# EAGLE board sparkfun_redstick (EAGLE 7.5.0)
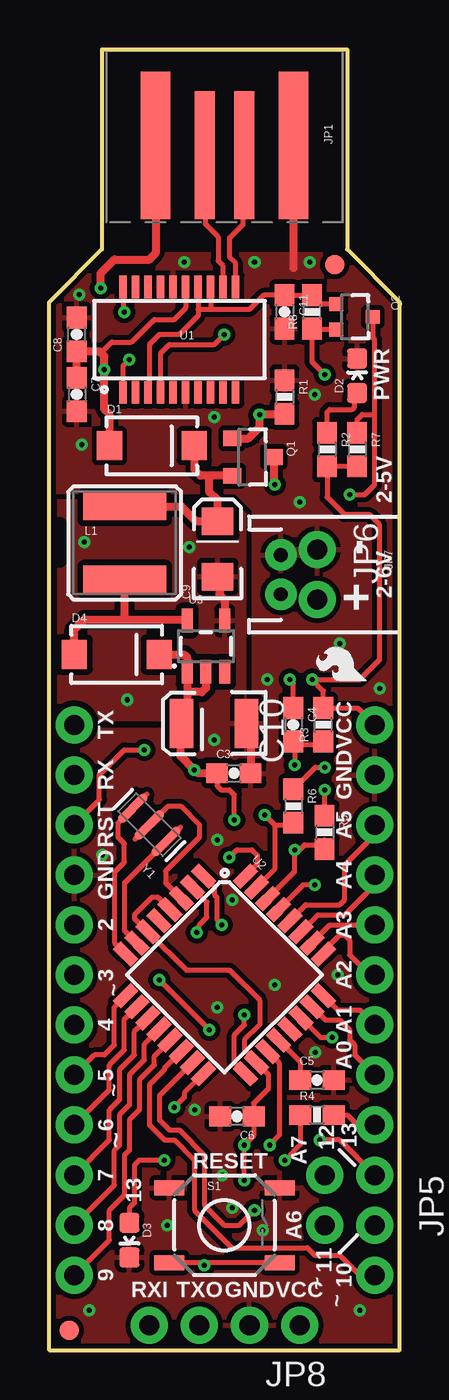
[diagram p0: board, top side]
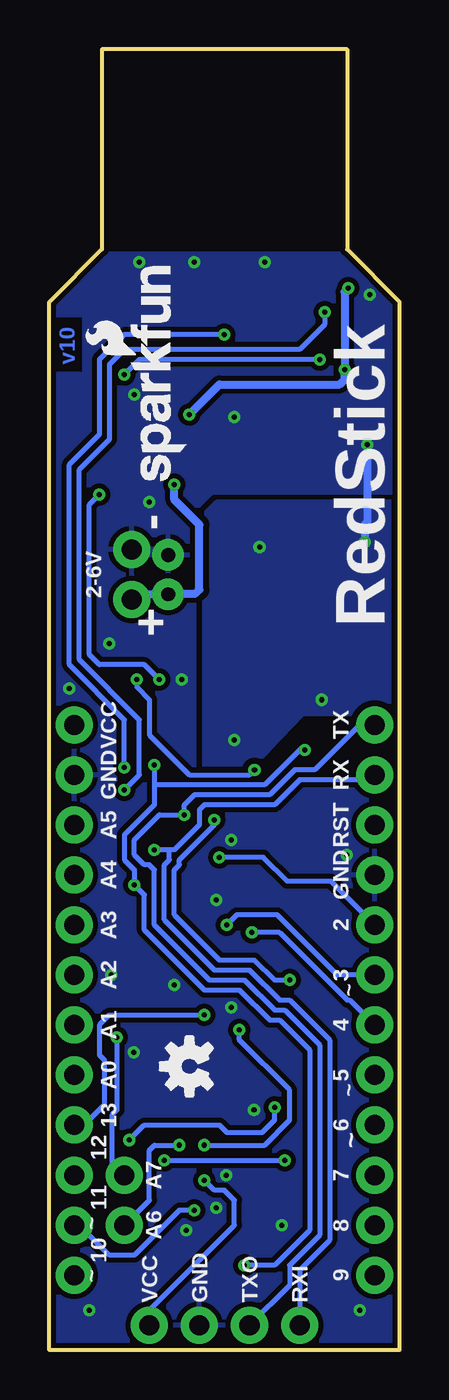
[diagram p1: board, bottom side, seen from below]

Size 17.78 x 66.04 mm. Coordinates in mm from the lower left corner, seen from the top.
Outline: 0,0 17.78,0 17.78,53.21 15.11,55.88 15.11,66.04 2.67,66.04 2.67,55.88 0,53.21 0,0
Copper layers (1*16): Top 0.035mm / dielectric 1.5mm / Bottom 0.035mm
Design rules "SparkFun-2-layer-TIGHT": minimum track width 7mil, minimum drill 15mil, track to track 7mil, track to pad 7mil, pad to pad 7mil, via to via 7mil, smd to smd 7mil, copper to edge 7mil, drill to drill 7mil, minimum pad ring 7mil, minimum via ring 7mil, stop-mask expansion 4mil, vias tented up to drill 20mil, thermal gap 10mil
tRestrict: 6 lines

## Footprints (pad centres in the part's own frame; a part is rotated, then mirrored left to right if it is on the bottom)
0603-CAP = smd 1.1 x 1: 1 -0.85,0; 2 0.85,0
EIA3216 = smd 1.4 x 1.6: A 1.4,0; C -1.4,0
EIA3528 = smd 1.2 x 2.5: A 1.65,0; C -1.65,0
SMA-DIODE = smd 1.27 x 1.47: A -2.15,0; C 2.15,0
LED-0603 = smd 1 x 1: A 0,-0.877; C 0,0.877
FIDUCIAL-1X2 = smd 1 x 1: 1 0,0
USB-A-PCB-NOPASTE = smd 7.5 x 1.5: 5V -0.2,-3.5; GND -0.2,3.5 | smd 6.5 x 1: USB_M 0.3,-1; USB_P 0.3,1
1X12_NO_SILK = drill 1.016 pad 1.88: 1 0,0; 2 2.54,0; 3 5.08,0; 4 7.62,0; 5 10.16,0; 6 12.7,0; 7 15.24,0; 8 17.78,0; 9 20.32,0; 10 22.86,0; 11 25.4,0; 12 27.94,0
1X02_NO_SILK = drill 1.016 pad 1.88: 1 0,0; 2 2.54,0
JST-2-PTH = drill 0.7 pad 1.6: 1 -1,0; 2 1,0
1X04_NO_SILK_ALL_ROUND = drill 1.016 pad 1.88: 1 0,0; 2 2.54,0; 3 5.08,0; 4 7.62,0
CR54 = smd 4.2 x 1.4: P$1 0,1.85; P$2 0,-1.85
SOT23-3 = smd 0.8 x 0.9: 1 -0.95,-1; 2 0.95,-1; 3 0,1.1
SOT323 = smd 0.7 x 0.7: 1 -0.65,-0.925; 2 0.65,-0.925; 3 0,0.925
0603-RES = smd 1.1 x 1: 1 -0.85,0; 2 0.85,0
TACTILE-SWITCH-SMD = smd 1.524 x 0.762: 1 -2.794,1.905; 2 2.794,1.905; 3 -2.794,-1.905; 4 2.794,-1.905
SSOP20_L = smd 0.381 x 1.143: 1 -2.857,-2.68; 2 -2.223,-2.68; 3 -1.587,-2.68; 4 -0.953,-2.68; 5 -0.318,-2.68; 6 0.318,-2.68; 7 0.953,-2.68; 8 1.587,-2.68; 9 2.223,-2.68; 10 2.857,-2.68; 11 2.857,2.68; 12 2.223,2.68; 13 1.587,2.68; 14 0.953,2.68; 15 0.318,2.68; 16 -0.318,2.68; 17 -0.953,2.68; 18 -1.587,2.68; 19 -2.223,2.68; 20 -2.857,2.68
TQFP32-08 = smd 1.27 x 0.559: 1 -4.293,2.8; 2 -4.293,2; 3 -4.293,1.2; 4 -4.293,0.4; 5 -4.293,-0.4; 6 -4.293,-1.2; 7 -4.293,-2; 8 -4.293,-2.8; 17 4.293,-2.8; 18 4.293,-2; 19 4.293,-1.2; 20 4.293,-0.4; 21 4.293,0.4; 22 4.293,1.2; 23 4.293,2; 24 4.293,2.8 | smd 0.559 x 1.27: 9 -2.8,-4.293; 10 -2,-4.293; 11 -1.2,-4.293; 12 -0.4,-4.293; 13 0.4,-4.293; 14 1.2,-4.293; 15 2,-4.293; 16 2.8,-4.293; 25 2.8,4.293; 26 2,4.293; 27 1.2,4.293; 28 0.4,4.293; 29 -0.4,4.293; 30 -1.2,4.293; 31 -2,4.293; 32 -2.8,4.293
SOT23-5 = smd 0.55 x 1.2: 1 -0.95,-1.3; 2 0,-1.3; 3 0.95,-1.3; 4 0.95,1.3; 5 -0.95,1.3
RESONATOR-SMD = smd 0.45 x 1.905: 1 -1.2,0; 2 0,0; 3 1.2,0

## Placement (x,y rotation side)
C3  0.1uF  [0603-CAP]  9.37,29.29 0 top
C4  0.1uF  [0603-CAP]  12.38,31.75 270 top
C5  0.1uF  [0603-CAP]  13.59,13.72 0 top
C6  0.1uF  [0603-CAP]  9.53,11.87 180 top
C7  0.1uF  [0603-CAP]  1.4,48.51 270 top
C8  0.1uF  [0603-CAP]  1.4,51.56 90 top
C9  10uF  [EIA3216]  8.54,40.67 90 top
C10  68uF  [EIA3528]  8.36,31.81 180 top
C11  0.1uF  [0603-CAP]  11.94,52.7 270 top
D1  MBRA140  [SMA-DIODE]  5.21,45.91 0 top
D2  RED  [LED-0603]  15.62,49.47 0 top
D3  GREEN  [LED-0603]  4.06,5.59 180 top
D4  MBRA140  [SMA-DIODE]  3.42,35.32 0 top
FID1  FIDUCIAL1X2  [FIDUCIAL-1X2]  1.02,1.02 0 top
FID2  FIDUCIAL1X2  [FIDUCIAL-1X2]  14.48,55.12 0 top
FRAME2  FRAME-LEDGER  [CREATIVE_COMMONS]  -20.09,-29.31 0 top  (outside the outline)
JP1  USBPCB_NOPASTE  [USB-A-PCB-NOPASTE]  8.89,60.96 270 top
JP2  DNP  [1X12_NO_SILK]  1.27,3.81 90 top
JP3  DNP  [1X12_NO_SILK]  16.51,31.75 270 top
JP5  M021X02_NO_SILK  [1X02_NO_SILK]  13.97,6.35 90 top
JP6  M021X02_NO_SILK  [1X02_NO_SILK]  13.59,40.64 270 top
JP7  DNP  [JST-2-PTH]  11.75,39.37 270 top
JP8  DNP  [1X04_NO_SILK_ALL_ROUND]  12.7,1.27 180 top
L1  47uH  [CR54]  3.83,40.98 0 top
LOGO1  SFE_LOGO_FLAME.1_INCH  [SFE_LOGO_FLAME_.1]  16.45,33.68 90 top
LOGO2  OSHW-LOGOS  [OSHW-LOGO-S]  10.67,14.41 90 bottom
Q1  DMG2307L  [SOT23-3]  10.29,45.34 270 top
Q2  MOSFET-NCHANNEL2N7002PW  [SOT323]  15.49,52.45 270 top
R1  100k  [0603-RES]  11.94,48.39 270 top
R2  6.8K  [0603-RES]  14.1,45.72 270 top
R3  10K  [0603-RES]  13.91,31.75 90 top
R4  2.2k  [0603-RES]  13.59,11.94 0 top
R5  1K  [0603-RES]  13.97,26.29 270 top
R6  1K  [0603-RES]  12.38,27.62 270 top
R7  10K  [0603-RES]  15.62,45.72 270 top
R8  10K  [0603-RES]  13.34,52.7 90 top
S1  SWITCH-MOMENTARY-2SMD-REDUNDANT  [TACTILE-SWITCH-SMD]  8.89,6.35 0 top
U1  FTS31XS-U  [SSOP20_L]  6.6,51.31 0 top
U2  ATMEGA328P_TQFP  [TQFP32-08]  8.89,19.05 315 top
U3  5.0v  [SOT23-5]  7.95,35.74 0 top
U$1  SFE_LOGO_NAME_FLAME.1_INCH  [SFE_LOGO_NAME_FLAME_.1]  10.73,43.69 90 bottom
Y1  16MHZ  [RESONATOR-SMD]  5.08,26.67 135 top

## Library data of the parts
C3-C8 C11 = SparkFun-Capacitors; PROD_ID: CAP-00810
C9 = SparkFun-Capacitors; PROD_ID: CAP-00811
C10 = SparkFun-Capacitors; PROD_ID: CAP-10790
D1 D4 = SparkFun-DiscreteSemi; PROD_ID: DIO-08053
D2 = SparkFun-LED; PROD_ID: DIO-00819
D3 = SparkFun-LED; PROD_ID: DIO-00821
FID1 FID2 FRAME2 LOGO1 LOGO2 U$1 = SparkFun-Aesthetics
JP1-JP3 JP5 JP6 JP8 = SparkFun-Connectors
JP7 = SparkFun-Connectors; PROD_ID: CONN-09863; SKU: PRT-09914
L1 = SparkFun-Passives; PROD_ID: NDUC-10789
Q1 = SparkFun-DiscreteSemi; PROD_ID: TRANS-11308
Q2 = SparkFun-DiscreteSemi; PROD_ID: TRANS-11151
R1 = SparkFun-Resistors; PROD_ID: RES-07828
R2 = SparkFun-Resistors; PROD_ID: RES-08597
R3 R7 R8 = SparkFun-Resistors; PROD_ID: RES-00824
R4 = SparkFun-Resistors; PROD_ID: RES-08272
R5 R6 = SparkFun-Resistors; PROD_ID: RES-07856
S1 = SparkFun-Electromechanical; FUNC: Reset; PROD_ID: SWCH-08247
U1 = SparkFun-DigitalIC; PROD_ID: IC-11524
U2 = SparkFun-DigitalIC; PROD_ID: IC-09069
U3 = SparkFun-PowerIC; PROD_ID: IC-10787
Y1 = SparkFun-FreqCtrl; PROD_ID: XTAL-08900

## Nets
3.3V: C11.1 Q2.1 R8.2 U1.3 U1.13 U1.14
A0: JP3.8 U2.23
A1: JP3.7 U2.24
A2: JP3.6 U2.25
A3: JP3.5 U2.26
A4: JP3.4 U2.27
A5: JP3.3 U2.28
A6: JP5.1 U2.19
A7: JP5.2 U2.22
AREF: C5.1 U2.20
D2: JP2.8 U2.32
D3: JP2.7 U2.1
D4: JP2.6 U2.2
D5: JP2.5 U2.9
D6: JP2.4 U2.10
D7: JP2.3 U2.11
D8: JP2.2 U2.12
D9: JP2.1 U2.13
D10: JP3.12 U2.14
D+: JP1.USB_P U1.11
D-: JP1.USB_M U1.12
DTR: C4.1 Q2.3 R7.1
GND: C3.2 C5.2 C6.2 C7.2 C8.2 C9.C C10.C C11.2 D2.C D3.C JP1.GND JP2.9 JP3.2 JP6.1 JP7.1 JP8.2 R1.1 S1.1 S1.2 U1.6 U1.16 U2.3 U2.5 U2.21 U3.4 Y1.2
MISO: JP3.10 U2.16
MOSI: JP3.11 U2.15
N$1: D3.A R4.1
N$3: R5.1 U1.20
N$4: D2.A R2.1
N$5: U2.7 Y1.1
N$6: U2.8 Y1.3
N$7: R6.1 U1.4
N$8: D4.A L1.P$2 U3.5
N$11: Q2.2 R8.1 U1.1
RESET: C4.2 JP2.10 R3.1 S1.3 S1.4 U2.29
RXI: JP2.11 JP8.4 R5.2 U2.30
SCK: JP3.9 R4.2 U2.17
TXO: JP2.12 JP8.3 R6.2 U2.31
V_USB: C7.1 C8.1 D1.A JP1.5V Q1.1 R1.2 U1.15
VBAT: JP6.2 JP7.2 Q1.3
VCC: C3.1 C6.1 C10.A D4.C JP3.1 JP8.1 R2.2 R3.2 R7.2 U2.4 U2.6 U2.18 U3.1 U3.2
VCC_1: C9.A D1.C L1.P$1 Q1.2

## Tracks (layer width: path | path; a pad name or v marks a point on that pad's centre or on a via)
3.3V
  Top 0.254: 8.19,52.83 10.16,52.83 10.88,53.55 C11.1 R8.2 13.37,53.59 13.34,53.59 13.83,53.1 Q2.1 | 8.13,53.92 U1.13 8.19,52.83 | 7.62,53.92 U1.14 7.56,52.83 | 7.56,52.83 7.56,52.51 6.6,51.56 5.59,51.56 5.08,51.05 5.08,48.69 U1.3 | 8.19,52.83 7.56,52.83
A0
  Top 0.254: U2.23 14,16.76 14.73,16.76 15.24,16.26 15.24,15.75 15.49,15.49 15.49,14.99 JP3.8
A1
  Top 0.254: U2.24 14.63,17.27 15.75,17.27 JP3.7
A2
  Top 0.254: JP3.6 16.26,19.05 15.24,20.07 15.24,20.83 14.99,21.08 14.73,21.08 13.9,20.25 U2.25
A3
  Top 0.254: JP3.5 14.22,21.59 13.34,20.71 U2.26
A4
  Top 0.254: JP3.4 16.26,24.13 16.26,23.37 14.99,22.1 13.63,22.1 U2.27
A5
  Top 0.254: JP3.3 16.51,26.16 14.99,24.64 14.99,22.86 14.73,22.61 13.01,22.61 U2.28
A6  (via drill 0.25)
  Top 0.254: v11.18,10.41 11.68,10.92 11.68,14.56 U2.19
  Bottom 0.254: v11.18,10.41 12.45,10.41 12.7,10.16 12.7,7.62 JP5.1
A7  (via drill 0.25)
  Top 0.254: U2.22 13.76,15.88 v14.35,15.88
  Bottom 0.254: v14.35,15.88 14.35,12.19 14.61,11.94 14.61,9.53 JP5.2
AREF
  Top 0.254: U2.20 12.74,14.63 C5.1
D2  (via drill 0.25)
  Top 0.254: v9.14,25.02 9.53,25.4 10.29,25.4 10.54,25.15 10.54,24.66 U2.32
  Bottom 0.254: v9.14,25.02 6.92,25.02 5.71,23.81 3.49,23.81 JP2.8
D3  (via drill 0.25)
  Top 0.254: v8.76,21.59 8.51,21.84 8.51,22.99 8.38,23.11 8.38,23.52 U2.1
  Bottom 0.254: v8.76,21.59 8.26,22.1 6.22,22.1 3.17,19.05 JP2.7
D4  (via drill 0.25)
  Top 0.254: v7.49,21.21 7.62,21.34 7.62,21.59 8,21.97 8,22.77 U2.2
  Bottom 0.254: JP2.6 2.54,17.78 2.67,17.78 6.1,21.21 v7.49,21.21
D5
  Top 0.254: JP2.5 2.29,14.99 2.79,14.99 3.3,15.49 3.3,17.42 U2.9
D6
  Top 0.254: JP2.4 3.05,13.21 3.05,14.48 3.81,15.24 3.81,16.8 U2.10
D7
  Top 0.254: JP2.3 3.05,10.67 3.05,12.19 3.56,12.7 3.56,14.22 4.32,14.99 4.32,16.18 U2.11
D8
  Top 0.254: JP2.2 3.3,8.38 3.3,10.16 3.56,10.41 3.56,11.94 4.06,12.45 4.06,13.97 4.83,14.73 4.83,15.55 U2.12
D9
  Top 0.254: JP2.1 3.05,5.59 3.05,7.11 3.81,7.87 3.81,9.91 4.06,10.16 4.06,11.68 4.57,12.19 4.57,13.72 5.33,14.48 5.33,14.93 U2.13
D10
  Top 0.254: 6.7,15.09 U2.14 5.84,14.3 5.84,14.22 5.08,13.46 5.08,11.43 5.84,10.67 6.35,10.67 7.37,9.65 7.37,7.11 9.27,5.21 13.08,5.21 13.46,4.83 14.73,4.83 15.75,3.81 JP3.12
D+
  Top 0.254: JP1.USB_P 9.84,60.61 9.84,57.15 9.14,56.45 9.14,55.5 9.46,55.18 U1.11
D-
  Top 0.254: JP1.USB_M 7.94,60.61 7.94,57.15 8.57,56.52 8.57,55.31 8.83,55.05 U1.12
DTR  (via drill 0.25)
  Top 0.254: C4.1 12.38,33.85 v12.19,34.04 | R7.1 15.62,47.24 15.88,47.5 16.51,47.5 | 16.51,47.5 16.51,51.31 16.42,51.4 Q2.3 | v15.24,43.43 16,43.43 16.51,43.94 16.51,47.5
  Bottom 0.254: v12.19,34.04 12.95,34.8 15.24,34.8 15.75,35.31 15.75,42.93 v15.24,43.43
GND  (via drill 0.25)
  Top 0.254: 12.39,54.94 12.38,54.93 | Y1.2 6.03,27.62 6.67,27.62 7.62,26.67 7.62,26.04 5.91,24.32 5.91,23.73 U2.3
  Top 0.406: JP1.GND 12.39,54.94 | C9.C 8.64,39.16 8.64,38.35 8.9,38.09 U3.4 | C10.C 10.22,31.61 C3.2
  Bottom 0.406: v1.65,45.97 1.65,42.04 1.78,41.91 v1.78,41.02
  other vias: 14.63,19.05 14.73,35.88 7.39,12.19 13.49,15.11 8.79,8.89 5.99,6.35 9.3,7.24 2.03,2.03 8.53,17.4 3.96,33.02 2.69,25.15 8.53,25.91 8.38,30.99 10.82,6.1 9.3,22.86 13.46,48.51 6.86,55.24 1.52,53.59 16.76,33.59 7.11,40.77 13.21,55.24 10.41,55.24 12.7,43.05 11.05,34.04 8.38,47.37 11.43,18.54 15.75,2.03
  pour Top (isolate 0.254, rank 2): 2.41,55.63 15.37,55.63 17.78,53.21 17.78,0 0,0 0,31.5 6.1,31.5 6.1,30.23 7.62,28.7 10.41,28.7 10.41,42.67 9.53,43.56 0,43.56 0,53.21
  pour Bottom (isolate 0.254, rank 2): 2.41,55.63 15.37,55.63 17.78,53.21 17.78,52.58 16,52.58 16,49.53 17.78,49.53 17.78,0 0,0 0,31.5 4.83,31.5 7.62,28.7 10.41,28.7 10.41,42.67 9.53,43.56 0,43.56 0,53.21
  pour Top (isolate 0.305): 0,32.07 6.99,32.07 6.99,30.16 7.94,29.21 9.91,29.21 9.91,42.42 9.27,43.05 0,43.05
  pour Bottom (isolate 0.305): 9.27,43.05 9.91,42.42 9.91,29.21 7.94,29.21 6.67,30.48 4.89,32.32 0,32.32 0,43.05
MISO  (via drill 0.25)
  Top 0.254: U2.16 6.86,13.06 6.86,12.83 v6.35,12.32 | JP3.10 14.73,10.67 v13.72,10.67
  Bottom 0.254: v13.72,10.67 12.95,11.43 9.14,11.43 8.76,11.05 6.99,11.05 6.35,11.68 v6.35,12.32
MOSI  (via drill 0.25)
  Top 0.254: U2.15 5.59,12.92 5.59,11.68 6.1,11.18 6.6,11.18 7.87,9.91 7.87,7.37 8.89,6.35 9.65,6.35 v10.41,7.11
  Bottom 0.254: JP3.11 16.26,6.35 14.73,4.83 13.46,4.83 11.18,7.11 v10.41,7.11
N$1  (via drill 0.25)
  Top 0.254: R4.1 12.74,10.45 v11.94,9.65 | v5.84,9.65 4.57,9.65 4.32,9.4 4.32,7.48 4.06,7.23 D3.A
  Bottom 0.254: v11.94,9.65 v5.84,9.65
N$3  (via drill 0.25)
  Top 0.254: R5.1 v13.97,28.45 | U1.20 3.75,52.77 v3.81,52.7
  Bottom 0.254: v13.97,28.45 13.21,29.21 13.21,32 16.26,35.05 16.26,44.7 14.73,46.23 14.73,50.04 13.97,50.8 5.08,50.8 3.81,52.07 v3.81,52.7
N$4
  Top 0.254: R2.1 14.1,47.62 14.22,47.75 15.37,47.75 15.49,47.88 15.49,48.46 D2.A
N$5
  Top 0.254: 4.37,20.75 U2.7 3.81,21.3 3.81,23.7 5.21,25.1 | 5.21,25.1 | 5.21,25.1 Y1.1
N$6
  Top 0.254: U2.8 3.3,20.68 3.3,24.26 3.81,24.77 3.81,25.72 3.49,26.04 3.49,26.78 3.51,26.8 | 3.51,26.8 | 3.51,26.8 Y1.3
N$7  (via drill 0.25)
  Top 0.254: R6.1 13.5,29.59 v13.97,29.59 | U1.4 5.65,50.61 6.1,51.05 8.38,51.05 v8.89,51.56
  Bottom 0.254: v13.97,29.59 13.97,32 16.76,34.8 16.76,44.96 15.24,46.48 15.24,50.29 13.97,51.56 v8.89,51.56
N$8
  Top 0.254: 3.31,37.09 3.3,37.08
  Top 0.406: D4.A 1.27,36.58 1.78,37.08 3.3,37.08 3.81,37.08 | 3.81,37.08 6.95,37.08 U3.5 | L1.P$2 3.81,39.13 3.81,37.08
N$11  (via drill 0.25)
  Top 0.254: Q2.2 13.32,51.8 13.34,51.82 | 13.34,51.82 13.37,51.82 R8.1 13.34,51.82 | U1.1 3.75,49.97 v4.06,50.29 | v13.97,49.53 13.34,50.16 13.34,51.82
  Bottom 0.254: v4.06,50.29 13.21,50.29 v13.97,49.53
RESET  (via drill 0.25)
  Top 0.254: v12.45,29.72 12.45,30.84 C4.2 12.55,30.73 13.72,30.73 13.88,30.9 R3.1 | v13.46,23.62 12.9,23.62 U2.29 | JP2.10 2.54,27.94 2.54,29.21 3.81,30.48 v4.83,30.48 | S1.3 7.75,4.45 v7.87,4.32 8,4.45 S1.4
  Bottom 0.254: v12.45,29.72 12.45,28.7 | 12.45,28.7 12.45,27.69 13.97,26.16 13.97,24.89 13.46,24.38 v13.46,23.62 12.95,23.11 12.95,21.34 9.91,18.29 8.13,18.29 6.6,16.76 6.1,16.76 4.57,15.24 4.57,6.1 6.35,4.32 v7.87,4.32 | v4.83,30.48 5.08,30.48 6.86,28.7 12.45,28.7
RXI  (via drill 0.25)
  Top 0.254: R5.2 13.97,25.91 13.72,25.65 12.95,25.65 12.7,25.4 v12.45,25.4 12.45,24.3 U2.30
  Bottom 0.254: JP2.11 1.52,28.96 5.08,28.96 6.35,27.69 9.91,27.69 10.16,27.43 10.16,26.67 11.43,25.4 11.68,25.4 | 11.68,25.4 v12.45,25.4 | 11.68,25.4 11.68,24.89 11.94,24.64 11.94,21.84 9.4,19.3 7.62,19.3 6.1,17.78 5.59,17.78 3.56,15.75 3.56,5.59 5.08,4.06 JP8.4
SCK  (via drill 0.25)
  Top 0.254: U2.17 9.4,14.58 9.4,16 9.91,16.51 v9.91,17.02 | R4.2 15.11,11.94 15.62,11.43 JP3.9
  Bottom 0.254: JP3.9 16,11.43 14.99,12.45 14.99,14.73 15.24,14.99 15.24,16.51 14.73,17.02 v9.91,17.02
TXO  (via drill 0.25)
  Top 0.254: 11.43,26.67 12.19,26.67 12.29,26.77 R6.2 | v10.92,27.18 11.43,26.67 | U2.31 11.43,24.42 11.43,26.67
  Bottom 0.254: JP2.12 2.03,31.75 4.32,29.46 5.33,29.46 6.6,28.19 10.41,28.19 10.92,27.69 v10.92,27.18 12.19,27.18 13.46,25.91 13.46,25.15 12.95,24.64 12.7,24.64 12.45,24.38 12.45,21.59 9.65,18.8 7.87,18.8 6.35,17.27 5.84,17.27 4.06,15.49 4.06,5.84 5.59,4.32 5.59,3.3 JP8.3
V_USB  (via drill 0.25)
  Top 0.254: JP1.5V | 2.54,50.71 2.71,50.71 3.17,51.18 4.19,51.18 5.33,52.32 6.35,52.32 6.92,52.9 U1.15 | 11.89,47.49 11.88,47.5
  Top 0.406: C7.1 C8.1 2.54,50.71 2.79,50.46 v2.79,49.78 2.79,47.75 3.06,47.49 D1.A | 11.89,47.49 R1.2 | v2.6,53.91 2.6,54.67 3.3,55.37 5.08,55.37 5.4,55.69 JP1.5V | 11.88,47.5 v10.67,47.5 10.67,46.86 10.09,46.29 Q1.1
  Bottom 0.406: v2.6,53.91 2.79,53.72 v2.79,49.78 2.79,49.28 3.05,49.02 9.14,49.02 v10.67,47.5
VBAT  (via drill 0.25)
  Top 0.406: Q1.3 11.39,43.98 v11.43,43.94
  Bottom 0.254: 11.7,38.42 JP7.2
  Bottom 0.406: JP7.2 13.32,38.37 JP6.2 | 11.7,38.42 10.35,38.42 10.16,38.61 10.16,41.91 11.43,43.18 v11.43,43.94
VCC  (via drill 0.25)
  Top 0.254: 6.65,31.75 C10.A | U2.4 5.52,22.99 5.21,22.99 4.35,22.13 4.35,21.89 U2.6 6.94,19.3 9.14,19.3 10.67,17.78 10.67,16.51 9.91,15.75 9.91,15.24 10.51,14.63 U2.18 11.11,14 11.11,13.27 10.38,12.53 C6.1 10.38,10.88 v9.91,10.41 v9.91,8.64 | JP3.1 15.66,32.6 R3.2 13.91,33.47 v13.34,34.04 15.75,34.04 16.76,35.05 16.76,41.91 16.26,42.42 14.99,42.42 14.1,43.31 R2.2 R7.2 | v8.13,16.26 v5.59,18.8 | v9.4,26.92 9.4,28.19 9.14,28.45 8.72,28.45 8.52,28.65 C3.1
  Top 0.406: C3.1 7.54,29.29 v7.37,29.46 6.67,30.16 6.67,31.77 C10.A | 7,33.4 U3.1 7,35.17 6.85,35.32 D4.C | 6.74,31.84 C10.A | U3.2 7.95,33.6 7.75,33.4 7,33.4 | 7,33.4 7,32.1 C10.A
  Bottom 0.254: v9.91,10.41 6.86,10.41 5.59,11.68 5.59,13.21 8.13,15.75 v8.13,16.26 | v13.34,34.04 13.34,33.66 12.7,33.02 12.7,31.24 10.67,29.21 7.62,29.21 v7.37,29.46 | v9.91,8.64 9.4,8.13 8.89,8.13 8.38,7.62 8.38,6.35 12.7,2.03 JP8.1 | v5.59,18.8 6.35,18.8 7.37,19.81 9.14,19.81 11.43,22.1 11.43,24.38 11.18,24.64 11.18,24.89 9.4,26.67 v9.4,26.92
VCC_1
  Top 0.406: D1.C 7.36,44.71 7.68,44.39 8,44.39 | Q1.2 8,44.39 | 8,44.39 8.13,44.26 8.13,43.56 8.54,43.15 C9.A 7.46,42.07 6.7,42.83 L1.P$1

## Text on the board
Bottom: v10
tPlace: PWR | 2-5V | - | 2-6V | + | TX | VCC | RX | GND | RST | A5 | GND | A4 | 2 | A3 | 3 | A2 | ~ | 4 | A1 | A0 | 5 | ~ | 6 | ~ | 12 | 13 | RESET | A7 | 7 | 13 | 8 | A6 | 11 | 9 | 10 | RXI | TXO | GND | VCC | ~ | ~
bPlace: RedStick | - | 2-6V | + | TX | VCC | RX | GND | RST | A5 | GND | A4 | 2 | A3 | 3 | A2 | ~ | 4 | A1 | 5 | A0 | ~ | 13 | ~ | 6 | 12 | 7 | A7 | 11 | 8 | A6 | ~ | 10 | 9 | ~ | RXI | TXO | GND | VCC
Measures: All measurements in inches
tDocu: PCB Thickness: 0.078 inch | Note on paneling: | Route | V-score | V-score | Marshall Taylor